# Altium PCB KamiGen2.PcbDoc
Units mil, origin at the board's own origin, x right, y up, seen from the top; angles counter-clockwise.
Board outline 3150 x 2285 mil, 2 copper layers (Top Layer, Bottom Layer); 37 components, 33 nets, 201 pads, 40 vias.
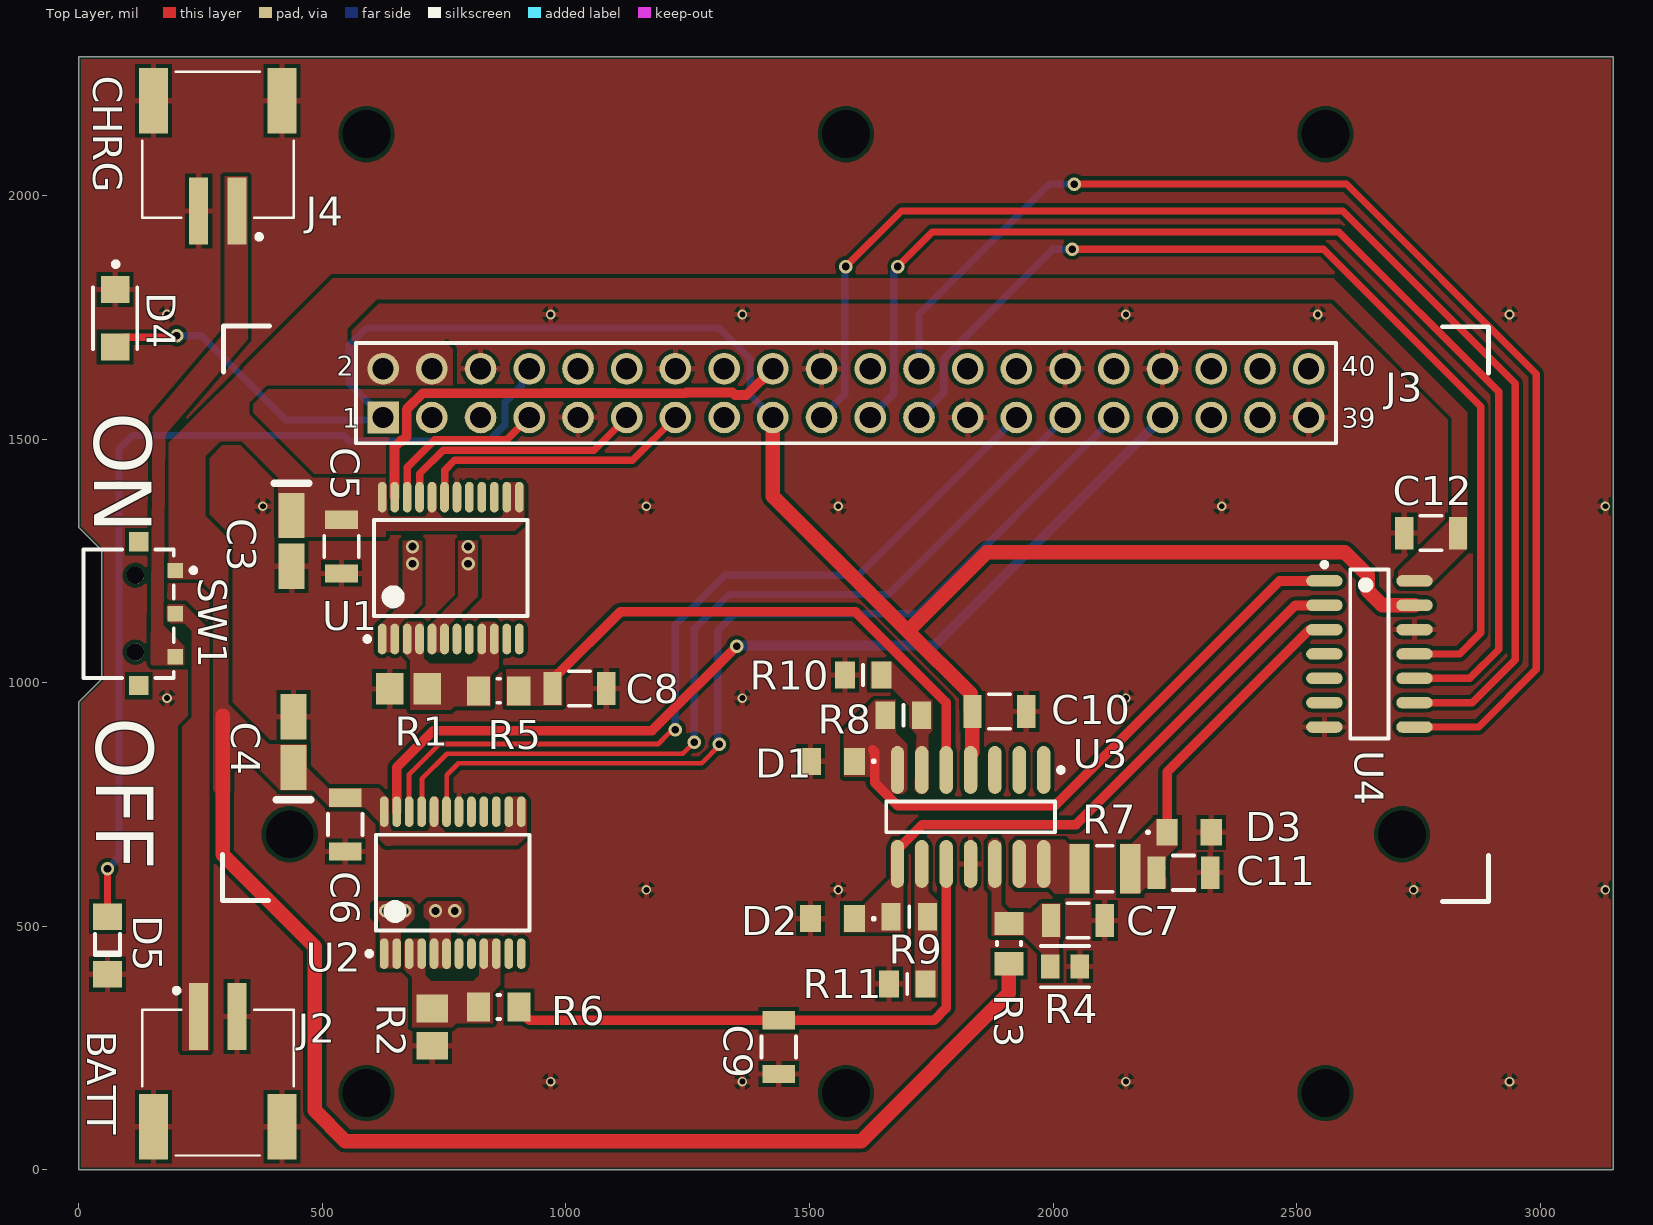
[diagram p0: Top Layer view]
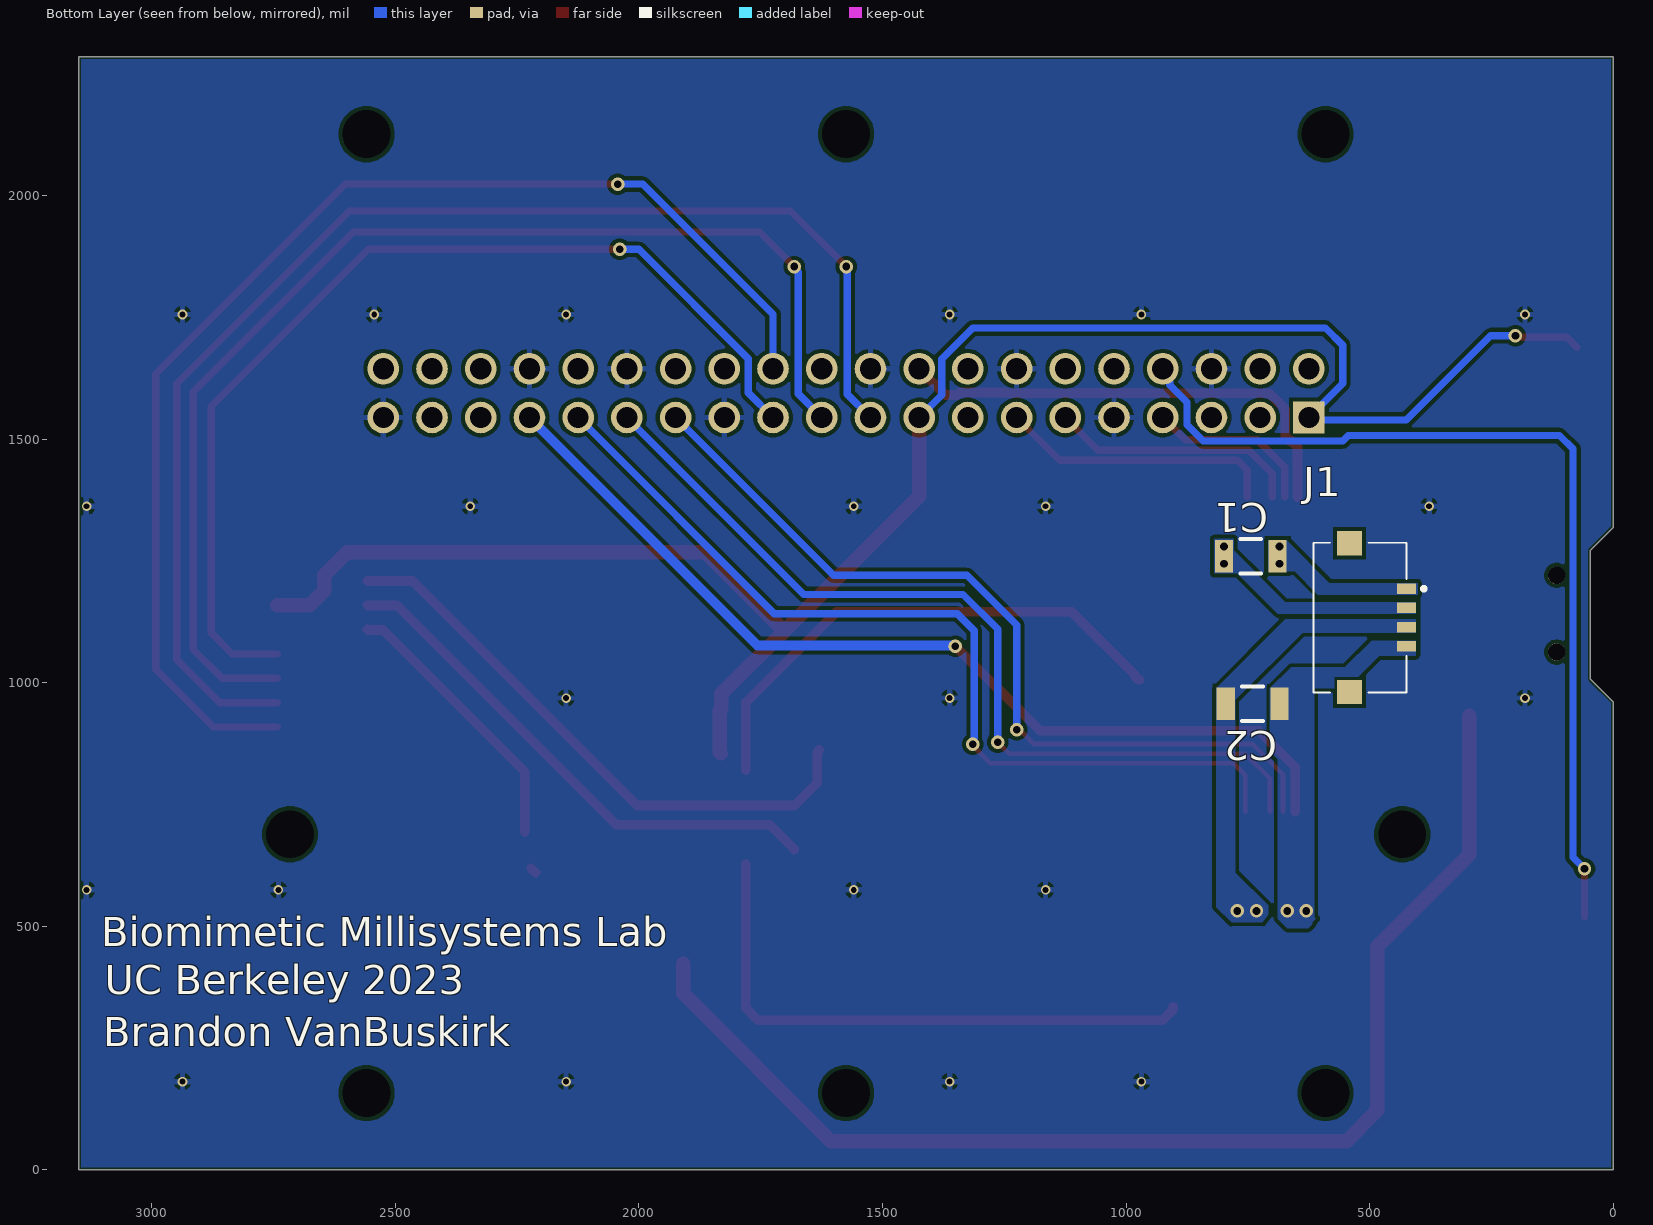
[diagram p1: Bottom Layer view, seen from below]
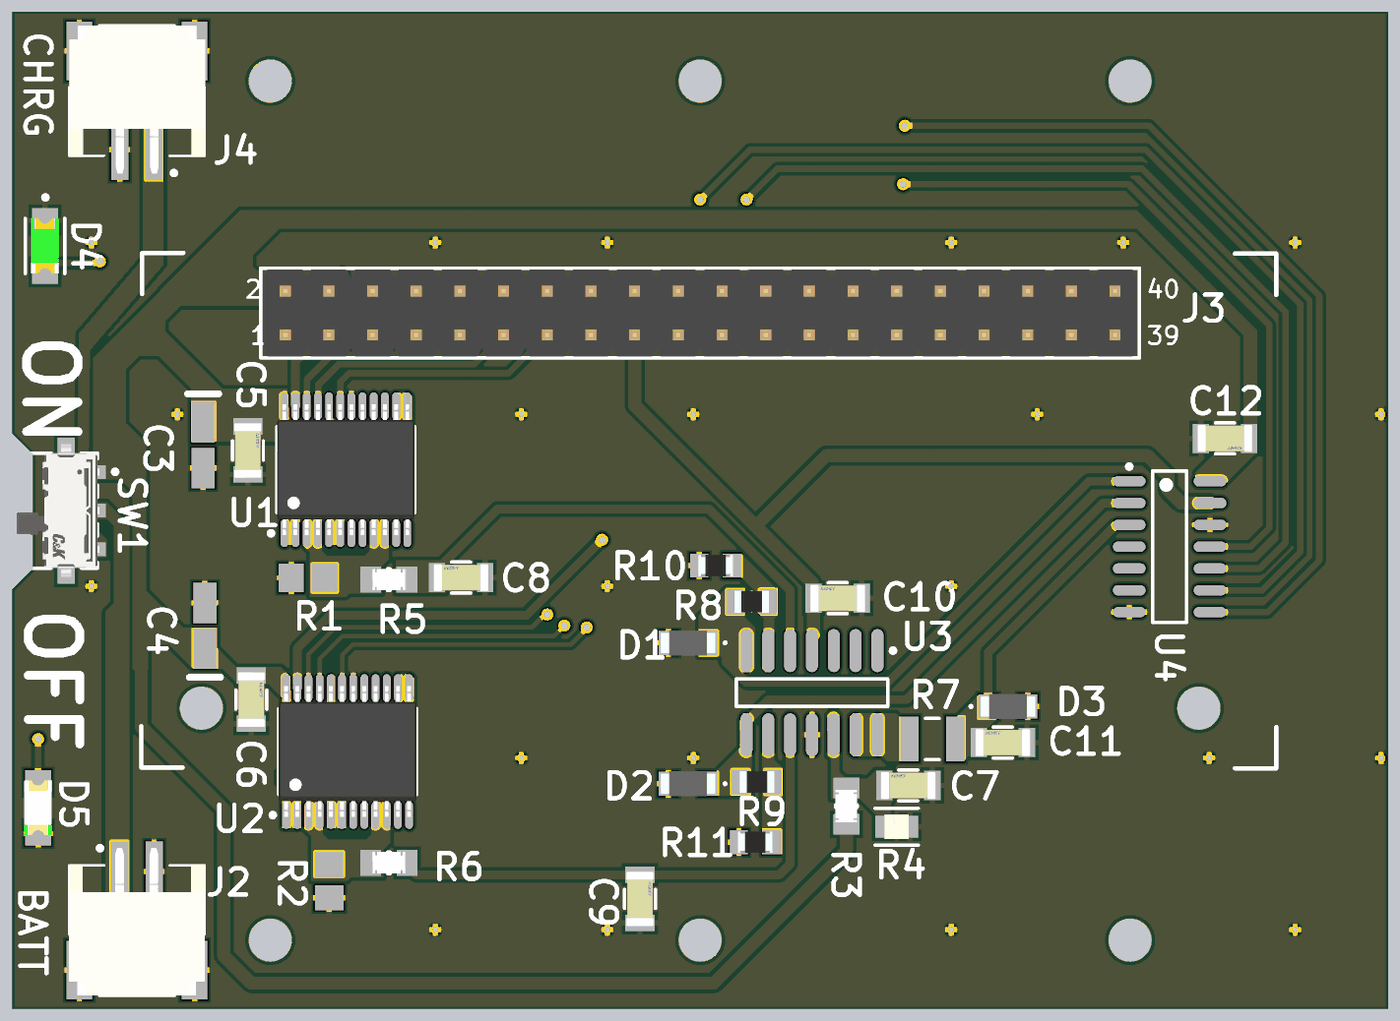
[diagram p2: 3D render of the assembled board from above, using the file's embedded part models]
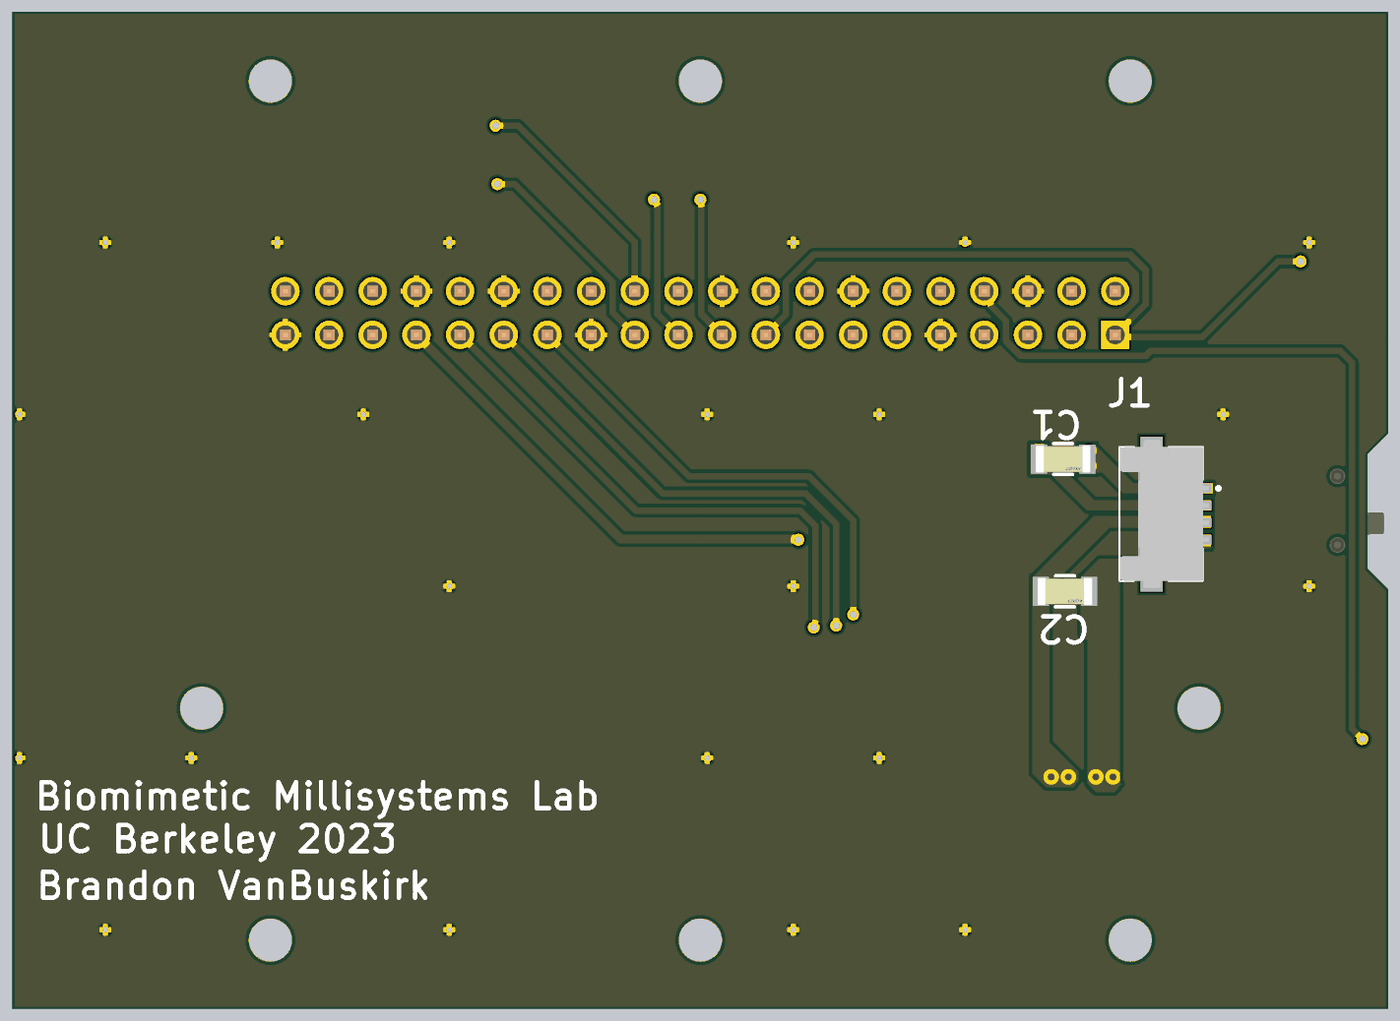
[diagram p3: 3D render of the assembled board from below, using the file's embedded part models]

## Layer stack, top to bottom
Top Solder: solder mask 0.4, Solder Resist, Dk 3.5
Top Layer: signal copper 1.4
Dielectric 1: dielectric 12.6, FR-4, Dk 4.8
Bottom Layer: signal copper 1.4
Bottom Solder: solder mask 0.4, Solder Resist, Dk 3.5

## Board outline
0,1318.9 47.24,1271.65 47.24,1007.87 0,960.63 0,0 3150,0 3150,2285 0,2285

## Design rules (kind name [scope] priority, off if disabled: settings)
BoardOutlineClearance [All] p1: gap=4.92 ignorepadtopadclearanceinfootprint=FALSE except(0: Arc-SplitContinuation Track-SplitContinuation SMDPad-SplitContinuation THPad-SplitContinuation Via-SplitContinuation Fill-SplitContinuation Poly-SplitContinuation Region-SplitContinuation Text-SplitContinuation)
Clearance Clearance_1 [InNet('GND')] p1: gap=7.87 ignorepadtopadclearanceinfootprint=FALSE
Clearance [All] p2: gap=6 ignorepadtopadclearanceinfootprint=TRUE except(0: Arc-Text Track-Text SMDPad-Text THPad-Text Via-Text Fill-Text Poly-Text Region-Text Text-Text)
Clearance Clearance_2 [All] p3: gap=10 ignorepadtopadclearanceinfootprint=TRUE except(0: Arc-Hole Track-Hole SMDPad-Hole THPad-Hole Via-Hole Fill-Hole Poly-Hole Region-Hole Text-Hole)
HoleSize [All] p1: absolutevalues=TRUE maxlimit=100 minlimit=7.87 maxpercent=80.000 minpercent=20.000
MinimumAnnularRing [All] p1 off: minimumring=5.91
PlaneConnect [All] p1: planeconnectstyle=Direct reliefexpansion=20 reliefentries=4 reliefconductorwidth=10 reliefairgap=10
PolygonConnect PolygonConnect_2 [InNet('GND') vs InNet('GND')] p1: connectstyle=Relief reliefconductorwidth=11.81 reliefentries=4 polygonreliefangle="90 Angle" airgapwidth=7.87
PolygonConnect PolygonConnect_1 [InNet('PGND') vs InNet('PGND')] p2: connectstyle=Relief reliefconductorwidth=11.81 reliefentries=4 polygonreliefangle="90 Angle" airgapwidth=7.87
PolygonConnect [All] p3: connectstyle=Direct reliefconductorwidth=10 reliefentries=4 polygonreliefangle="90 Angle" airgapwidth=10
RoutingVias [All] p1: holewidth=28 width=50 viastyle="Through Hole" minholewidth=28 minwidth=50 maxholewidth=28 maxwidth=50
SilkToSilkClearance [All] p1: silktosilkclearance=0
SolderMaskExpansion [All] p1: expansion=4 istentingtop=FALSE
Width [All] p1: maxlimit=100 minlimit=10 preferedwidth=15 minimp=50.000000 maximp=50.000000 favimp=50.000000
27 further rules are at their usual default settings.

## Components (designator, comment, footprint, x,y, rotation, side; value= is the part's Value field where it differs from the comment)
C1 "C1206C104K3RACTU" FP-C1206C-EB-MFG 744.09,1259.84 r0 bottom value=100nF
C2 "C1206C104K3RACTU" FP-C1206C-EB-MFG 740.16,956.69 r0 bottom value=100nF
C3 "T491A106K010AT" KEMT-A-3216-18-2_M 437.01,1291.34 r270 top
C4 "T491A106K010AT" KEMT-A-3216-18-2_M 440.94,877.95 r90 top
C5 "C1206C104K3RACTU" FP-C1206C-EB-MFG 539.37,1279.53 r270 top value=100nF
C6 "C1206C104K3RACTU" FP-C1206C-EB-MFG 547.24,708.66 r270 top value=100nF
C7 "C1206C104K3RACTU" FP-C1206C-EB-MFG 2051.18,511.81 r0 top value=100nF
C8 "C1206C104K3RACTU" FP-C1206C-EB-MFG 1027.56,988.19 r0 top value=100nF
C9 "C1206C104K3RACTU" FP-C1206C-EB-MFG 1437.01,251.97 r270 top value=100nF
C10 "C1206C104K3RACTU" FP-C1206C-EB-MFG 1889.76,940.94 r0 top value=100nF
C11 "C1206C104K3RACTU" FP-C1206C-EB-MFG 2267.72,610.24 r0 top value=100nF
C12 "C1206C104K3RACTU" FP-C1206C-EB-MFG 2776.2,1307.24 r180 top value=100nF
D1 "BZY55B3V3_RBG" BZY55B3V3RBG 1547.24,838.58 r180 top
D2 "BZY55B3V3_RBG" BZY55B3V3RBG 1547.24,515.75 r180 top
D3 "BZY55B3V3_RBG" BZY55B3V3RBG 2279.53,692.91 r0 top
D4 "150120GS75000" FP-150120GS75000-MFG 74.8,1748.03 r270 top
D5 "150120BS75000" 1206_A 59.06,460.63 r90 top
J1 "503763-0491" 5037630491 500,1133.86 r90 bottom
J2 "S2B-PH-SM4-TB(LF)(SN)" JST_S2B-PH-SM4-TB(LF)(SN) 285.43,314.96 r0 top
J3 "40 Pin Header (2.54mm)" 61304021121 1574.8,1594.49 r0 top
J4 "S2B-PH-SM4-TB(LF)(SN)" JST_S2B-PH-SM4-TB(LF)(SN) 285.43,1968.5 r180 top
R1 "WSL0805R0500FEA" RESC2013X46X38ML25T25 676.94,987.37 r0 top
R2 "WSL0805R0500FEA" RESC2013X46X38ML25T25 725.51,293.02 r90 top
R3 "CRCW080510K0FKEA" FP-CRCW0805-e3-IPC_A 1909.45,464.57 r90 top
R4 "ERJ-6ENF1502V" FP-ERJ6EN-IPC_C 2024.58,417.32 r180 top
R5 "CRCW080510K0FKEA" FP-CRCW0805-e3-IPC_A 861.98,983.44 r0 top
R6 "CRCW080510K0FKEA" FP-CRCW0805-e3-IPC_A 862.2,334.65 r180 top
R7 "ERJ-14NF1001U" RESC3225X70X50LL20T20 2106.3,618.11 r0 top value=1k
R8 "CRGH0805F787R" RESC2013X65N 1692.91,933.07 r0 top
R9 "CRGH0805F787R" RESC2013X65N 1704.72,519.68 r0 top
R10 "ERJ-6RBD2000V" RESC2012X70N 1610.24,1015.75 r0 top
R11 "ERJ-6RBD2000V" RESC2012X70N 1700.79,381.89 r0 top
SW1 "JS102000SAQN" FP-JS102000SAQN-MFG 102.36,1141.73 r270 top
U1 "TB6612FNG" TOSH-SSOP-24_M 763.55,1235.4 r90 top
U2 "TB6612FNG" TOSH-SSOP-24_M 767.72,589.57 r90 top
U3 "AD8544ARZ" ADI-R-14_M 1830.71,724.41 r270 top
U4 "MCP3004-I/SL" SOIC-SL14_L 2649.61,1059.06 r0 top

## Footprints (in the part's own frame and the unit in brackets; to place one, negate y for a bottom-side part, rotate by r counter-clockwise, add the part's x,y. Pads: shape width x height; smd on the part's side, far side on the other; paste and mask are expansions set on the pad)
1206_A [mm] "Chip LED, 2-Leads, Body 3.2x1.6mm, IPC Medium Density"
  rect 1.4x1.5 smd: 1(-1.5,0) 2(1.5,0)
  silkscreen extent -0.5,-0.67 0.6,0.65, body extent -1.6,-0.8 1.6,0.8, height 0.68
5037630491 [mm]
  rect 0.55x1 smd: 1(1.5,-1.925) 2(0.5,-1.925) 3(-0.5,-1.925) 4(-1.5,-1.925)
  rect 1.26x1.3 smd: 5(-3.875,1.055) 6(3.875,1.055)
  silkscreen extent -3.9,-2.92 3.9,2.93, body extent -4.3,-2.29 4.3,2.9, height 1.5
61304021121 [mm] "Pin Header, pitch 2.54 mm, THT, Vertical, dual row, 40p"
  rect 1.65x1.65 hole 1.1: 1(-24.13,-1.27)
  round 1.65 hole 1.1: 2(-24.13,1.27) 3(-21.59,-1.27) 4(-21.59,1.27) 5(-19.05,-1.27) 6(-19.05,1.27) 7(-16.51,-1.27) 8(-16.51,1.27) 9(-13.97,-1.27) 10(-13.97,1.27) 11(-11.43,-1.27) 12(-11.43,1.27) 13(-8.89,-1.27) 14(-8.89,1.27) 15(-6.35,-1.27) 16(-6.35,1.27) 17(-3.81,-1.27) 18(-3.81,1.27) 19(-1.27,-1.27) 20(-1.27,1.27) 21(1.27,-1.27) 22(1.27,1.27) 23(3.81,-1.27) 24(3.81,1.27) 25(6.35,-1.27) 26(6.35,1.27) 27(8.89,-1.27) 28(8.89,1.27) 29(11.43,-1.27) 30(11.43,1.27) 31(13.97,-1.27) 32(13.97,1.27) 33(16.51,-1.27) 34(16.51,1.27) 35(19.05,-1.27) 36(19.05,1.27) 37(21.59,-1.27) 38(21.59,1.27) 39(24.13,-1.27) 40(24.13,1.27)
  silkscreen extent -25.55,-2.61 25.55,2.62, body extent -25.4,-2.54 25.4,2.54, height 8.59
ADI-R-14_M [mm] "SOIC, 14-Leads, Body 8.65x3.9mm, Pitch 1.27mm, IPC Low Density"
  oval 2.5x0.7 smd: 1(-2.45,3.81) 2(-2.45,2.54) 3(-2.45,1.27) 4(-2.45,0) 5(-2.45,-1.27) 6(-2.45,-2.54) 7(-2.45,-3.81) 8(2.45,-3.81) 9(2.45,-2.54) 10(2.45,-1.27) 11(2.45,0) 12(2.45,1.27) 13(2.45,2.54) 14(2.45,3.81)
  silkscreen extent -2.57,-4.4 0.8,4.84, body extent -2,-4.4 2,4.4, height 1.75
BZY55B3V3RBG [mm]
  rect 1.1x1.4 smd: 1(-1.15,0) 2(1.15,0)
  silkscreen extent -2.2,-0.05 -2.1,0.05, body extent -1.59,-0.72 1.59,0.72, height 0.95
FP-150120GS75000-MFG [mm]
  rect 1.4x1.5 smd paste+0 mask+0: 1(-1.5,0) 2(1.5,0)
  silkscreen extent -2.95,-1.15 1.6,1.15, body extent -2.3,-0.95 2.3,0.95, height 0.25
FP-C1206C-EB-MFG [mm]
  rect 0.95x1.7 smd paste+0 mask+0: 1(-1.4,0) 2(1.4,0)
  silkscreen extent -0.55,-0.9 0.55,0.9, body extent -1.6,-0.8 1.6,0.8, height 0.88
FP-CRCW0805-e3-IPC_A [mil]
  rect 47.5x59.38 smd paste+0 mask+0: 1(-41.37,0) 2(41.37,0)
  silkscreen extent -3,-25 3,25, body extent -85,-49 85,49, height 10
FP-ERJ6EN-IPC_C [mil]
  rect 37.59x49.69 smd paste+0 mask+0: 1(-30.54,0) 2(30.54,0)
  silkscreen extent -49,-42 49,42, body extent -53,-31 53,31, height 10
FP-JS102000SAQN-MFG [mm]
  rect 0.8x0.8 smd paste+0 mask+0: 1(-2.25,2.43) 2(0,2.43) 3(2.25,2.43)
  rect 1x1 smd paste+0 mask+0: 4(-3.75,0.53) 5(3.75,0.53)
  round 0.9 hole 0.9 unplated paste-1000 mask+0: ""(-2,0.35) ""(2,0.35)
  silkscreen extent -3.35,-2.35 3.35,3.51, body extent -4.35,-2.45 4.35,2.93, height 0.25
JST_S2B-PH-SM4-TB(LF)(SN) [mm]
  rect 1x3.5 smd: 1(-1,0) 2(1,0)
  rect 1.5x3.4 smd: S1(-3.35,-5.75) S2(3.35,-5.75)
  silkscreen extent -3.95,-7.25 3.95,1.45, body extent -3.96,-7.22 3.94,1.38, height 5.5
KEMT-A-3216-18-2_M [mm] "Molded TAN Capacitor, 2-Leads, Body 3.4x1.8mm, IPC Low Density"
  rect 2.35x1.35 smd: 1(-1.325,0) 2(1.325,0)
  silkscreen extent -3,-0.9 -3,0.9, body extent -1.7,-0.9 1.7,0.9, height 1.8
RESC2012X70N [mm]
  rect 1.05x1.4 smd: 1(-0.95,0) 2(0.95,0)
  silkscreen extent 0,-0.53 0,0.53, body extent -1,-0.63 1,0.63, height 0.6
RESC2013X46X38ML25T25 [mm] "Chip Resistor, 2-Leads, Body 2.03x1.27mm, IPC Low Density"
  rect 1.45x1.65 smd: 1(-0.975,0) 2(0.975,0)
  body extent -1.14,-0.76 1.14,0.76, height 0.46
RESC2013X65N [mm]
  rect 1x1.45 smd: 1(-0.95,0) 2(0.95,0)
  silkscreen extent 0,-0.54 0,0.54, body extent -1,-0.64 1,0.64, height 0.65
RESC3225X70X50LL20T20 [mm] "Chip Resistor, 2-Leads, Body 3.20x2.50mm, IPC High Density"
  rect 1.05x2.6 smd: 1(-1.325,0) 2(1.325,0)
  silkscreen extent -0.4,-1.2 0.4,1.2, body extent -1.7,-1.35 1.7,1.35, height 0.7
SOIC-SL14_L [mm] "SOIC, 14-Leads, Body 8.7x3.9mm, Pitch 1.27mm, IPC High Density"
  oval 1.9x0.6 smd: 1(-2.35,3.81) 2(-2.35,2.54) 3(-2.35,1.27) 4(-2.35,0) 5(-2.35,-1.27) 6(-2.35,-2.54) 7(-2.35,-3.81) 8(2.35,-3.81) 9(2.35,-2.54) 10(2.35,-1.27) 11(2.35,0) 12(2.35,1.27) 13(2.35,2.54) 14(2.35,3.81)
  silkscreen extent -2.47,-4.4 1,4.78, body extent -2,-4.38 2,4.38, height 1.75
TOSH-SSOP-24_M [mm] "SOP, 24-Leads, Body 8x5.8mm, Pitch 0.65mm, IPC Low Density"
  oval 1.6x0.45 smd: 1(-3.7,3.575) 2(-3.7,2.925) 3(-3.7,2.275) 4(-3.7,1.625) 5(-3.7,0.975) 6(-3.7,0.325) 7(-3.7,-0.325) 8(-3.7,-0.975) 9(-3.7,-1.625) 10(-3.7,-2.275) 11(-3.7,-2.925) 12(-3.7,-3.575) 13(3.7,-3.575) 14(3.7,-2.925) 15(3.7,-2.275) 16(3.7,-1.625) 17(3.7,-0.975) 18(3.7,-0.325) 19(3.7,0.325) 20(3.7,0.975) 21(3.7,1.625) 22(3.7,2.275) 23(3.7,2.925) 24(3.7,3.575)
  silkscreen extent -3.82,-4 2.5,4.47, body extent -3.8,-4 3.8,4, height 1.6

## Part data
C1 C2 C5 C6 C7 C8 C9 C10 C11 C12: library part CMP-00100-1, "CAP CER 0.1UF 25V 10% X7R 1206", Case Code (Imperial)=1206, Case Code (Metric)=3216, Dielectric=X7R, Max Operating Temperature=125°C, Min Operating Temperature=-55°C, Package Quantity=4000, Tolerance=10%, Voltage Rating=25V, Case/Package=1206, Construction=Flat, Depth=1.6mm, Dissipation Factor=3.5%, Height=0.78mm, Length=3.2mm, Mounting Technology="Surface Mount", Packaging="Cut Tape", Reach SVHC Compliant=No, Series=C, Termination=SMD/SMT, Thickness=0.035inch, Voltage Rating (DC)=25V, Width=0.063inch
C3 C4: library part CMP-2000-05172-1, "Capacitor, Tantalum, 10 uF, +/- 10%, 10 V, -55 to 125 degC, 2-Pin SMD (1206), RoHS, Tape and Reel", Capacitance=10µF, ESR (Equivalent Series Resistance)=3.8Ohm, Lifetime @ Temp.=2000Hrs@85degC, Manufacturer=Kemet, Manufacturer Size Code=A, Operating Temperature=-55degC~125degC, Package / Case=1206(3216Metric), Package Description="2-Pin Surface Mount Device, Body 3.2 x 1.6 mm", Package Reference=1206, Standard Package=2,000, Tolerance=±10%, Voltage - Rated=10V, Catalog Drawings=T49x,T5xxSeries_A-side1T49x,T5xxSeries_A,B-side2T49x,T5xxSeries_A,SBottom, Category=Capacitors, Datasheet URL=http://www.farnell.com/datasheets/1824869.pdf, Datasheet Version=Apr-14, Family=TantalumCapacitors, Features=GeneralPurpose, Height - Seated (Max)="0.071\"(1.80mm)", Lead Spacing=-, Manufacturer URL=http://www.kemet.com/, Mounting Type=SurfaceMount, Online Catalog=T491Series, Other Names=399-3684-2, Packaging=Tape&Reel(TR), Product Training Modules=CapacitorBasics-TypicalUsesforCapacitorsDeratingGuidelinesforSurfaceMountTantalumCapacitors, Series=T491, Size / Dimension="0.126\"Lx0.063\"W(3.20mmx1.60mm)", Type=Molded
D1 D2 D3: "Diode", Manufacturer_Name="Taiwan Semiconductor", Manufacturer_Part_Number="BZY55B3V3 RBG", Mouser Part Number=821-BZY55B3V3RBG, Zener Voltage=3.3V, Datasheet Link="https://componentsearchengine.com/Datasheets/1/BZY55B3V3 RBG.pdf", Height=0.85mm, Mouser Price/Stock=https://www.mouser.co.uk/ProductDetail/Taiwan-Semiconductor/BZY55B3V3-RBG?qs=mAH9sUMRCtvrJdI%2FtfeTug%3D%3D
D4: library part CMP-1426-00014-2, "LED GREEN CLEAR 1206 SMD", Case Code (Imperial)=1206, Case Code (Metric)=3216, Color=Green, Forward Current=30mA, Forward Voltage=3.2V, Lens Color=Colorless, Max Operating Temperature=85°C, Min Operating Temperature=-40°C, Package Quantity=1, Test Current=20mA, Case/Package=1206, Dominant Wavelength=520nm, Height=0.69mm, Length=3.2mm, Lens Size=1.6mm, Lens Style=Clear, Lens Transparency=Clear, Luminous Intensity=450mcd, Mount="Surface Mount", Packaging="Cut Tape", RoHS Compliant=Yes, Series=WL-SMCW, Viewing Angle=140°, Wavelength=520nm, Width=1.6mm
D5: library part CMP-1426-00015-1, "SMD mono-color Chip LED, WL-SMCW, Blue", Color=Blue, Forward Voltage=3.2V, Manufacturer="Wuerth Elektronik", ComponentLink1Description="Manufacturer URL", ComponentLink1URL=http://www.we-online.com, ComponentLink2Description=Datasheet, ComponentLink2URL=http://katalog.we-online.com/led/datasheet/150120BS75000.pdf, PackageReference=1206, PartNumber=150120BS75000
J1: "Connector", Manufacturer_Name=Molex, Mouser Part Number=538-503763-0491, Datasheet Link=https://www.molex.com/webdocs/datasheets/pdf/en-us/5037630491_PCB_HEADERS.pdf, Height=1mm, Manufacturer_Part_Number=503763-0491, Mouser Price/Stock=https://www.mouser.co.uk/ProductDetail/Molex/503763-0491?qs=zwvsCB%2Fxu0cTZVAek%2FYVrQ%3D%3D
J2 J4: library part CMP-064-000001-2, "Connector Header Surface Mount, Right Angle 2 position 0.079 (2.00mm)", Package=None, Check_prices=https://www.snapeda.com/parts/S2B-PH-SM4-TB(LF)(SN)/JST+Sales+America+Inc./view-part/?ref=eda, Component Type=Standard, Design Item ID=S2B-PH-SM4-TB(LF)(SN), Digi-Key_Part_Number=455-1749-2-ND, MF="JST Sales", MP=S2B-PH-SM4-TB(LF)(SN), Pin Count=4, Purchase-URL=https://pricing.snapeda.com/search/part/S2B-PH-SM4-TB(LF)(SN)/?ref=eda, SnapEDA_Link=https://www.snapeda.com/parts/S2B-PH-SM4-TB(LF)(SN)/JST+Sales+America+Inc./view-part/?ref=snap, Source=S2B-PH-SM4-TB(LF)(SN).SchLib
J3: library part CMP-00112-1, "WR-PHD Straight Male, PCB Header, Through Hole, 2 Rows, 40 Contacts, 2.54mm Pitch", Flammability Rating="UL94 V-0", Insulation Color=Black, Max Operating Temperature=105°C, Min Operating Temperature=-40°C, Voltage Rating=250V, Connector Type=Header, Contact Finish - Mating=GOLD, Contact Material="Copper Alloy,Copper", Contact Plating=Gold, Contact Shape=Square, Contact Type="Male Pin", Fastening Type=Pull, Gender=Male, Insulation Material=Nylon, Mounting Technology="Through Hole", Number of Contacts=40, Number of Positions=40, Number of Rows=2, Reach SVHC Compliant=Unknown, RoHS Compliant=Yes, Series=WR-PHD, Termination=Solder
R1 R2: library part CMP-2001-04327-1, Case=0805, Manufacturer="Vishay Dale", Resistance=50mOhm, Part Number=WSL0805R0500FEA
R3 R5 R6: library part CMP-2001-04908-2, "RES Thick Film, 10kΩ, 1%, 0.125W, 100ppm/°C, 0805", Case Code (Imperial)=0805, Case Code (Metric)=2012, Max Operating Temperature=155°C, Min Operating Temperature=-55°C, Package Quantity=5000, Power Rating=125mW, Resistance=10k, Temperature Coefficient=100ppm/°C, Tolerance=1%, Voltage Rating=150V, Case/Package=0805, Composition="Thick Film", Contact Plating=Tin, Depth=1.25mm, Height=0.45mm, Lead Free="Lead Free", Length=2mm, Military Standard=Not, Packaging="Tape and Reel", Radiation Hardening=No, Termination=SMD/SMT, Voltage Rating (DC)=150V, Weight=0.000194oz, Width=1.25mm
R4: library part CMP-2001-04439-3, "RES SMD 15K OHM 1% 1/8W 0805", Case Code (Imperial)=0805, Case Code (Metric)=2012, Max Operating Temperature=155°C, Max Power Dissipation=125mW, Min Operating Temperature=-55°C, Package Quantity=1, Resistance=15k, Resistance Tolerance=1%, Resistor Type="Thick Film", Temperature Coefficient=100ppm/°C, Voltage Rating=150V, Case/Package=0805, Construction=Rectangular, Contact Plating=Tin, Depth=1.25mm, Features="Automotive AEC-Q200", Height=0.6mm, Lead Free="Lead Free", Length=2mm, Military Standard=Not, Mount="Surface Mount", Number of Pins=2, Number of Terminations=2, Packaging="Tape and Reel", Power Rating=125mW, Radiation Hardening=No, Reach SVHC Compliant=Yes, RoHS Compliant=Yes, Series=ERJ, Size Code=0805, Technology="THICK FILM", Termination=SMD/SMT, Tolerance=1%, Voltage Rating (DC)=150V, Width=1.2mm
R7: library part CMP-00078-1, "Res Thick Film 1210 1K Ohm 1% 1/2W ±100ppm/°C Molded SMD Embossed Carrier T/R", Case Code (Imperial)=1210, Case Code (Metric)=3225, Max Operating Temperature=155°C, Max Power Dissipation=500mW, Min Operating Temperature=-55°C, Package Quantity=5000, Ratings=AEC-Q200, Resistance Tolerance=1%, Resistor Type="Thick Film", Temperature Coefficient=100ppm/°C, Voltage Rating=200V, Case/Package=1210, Construction=Rectangular, Contact Plating=Tin, Depth=2.5mm, Features="Automotive AEC-Q200", Height=0.6mm, Lead Free="Lead Free", Length=3.2mm, Military Standard=Not, Mounting Technology="Surface Mount", Number of Terminations=2, Packaging="Tape and Reel", Power Rating=500mW, Radiation Hardening=No, RoHS Compliant=Yes, Series=ERJ, Technology="THICK FILM", Termination=SMD/SMT, Tolerance=1%, Voltage Rating (DC)=200V, Weight=0.000564oz, Width=2.5mm
R8 R9: "Resistor", Case=0805, Manufacturer_Name="TE Connectivity", Mouser Part Number=279-CRGH0805F787R, Resistance=787, Datasheet Link=http://docs-europe.electrocomponents.com/webdocs/12d7/0900766b812d7379.pdf, Height=0.65mm, Manufacturer_Part_Number=CRGH0805F787R, Mouser Price/Stock=https://www.mouser.co.uk/ProductDetail/TE-Connectivity-AMP/CRGH0805F787R?qs=HLeXuo0aL2qb48ulaDUW5w%3D%3D
R10 R11: "Resistor", Case=0805, Manufacturer_Name=Panasonic, Mouser Part Number=667-ERJ-6RBD2000V, Resistance=200, Arrow Part Number=ERJ-6RBD2000V, Arrow Price/Stock=https://www.arrow.com/en/products/erj6rbd2000v/panasonic, Datasheet Link=https://datasheet.datasheetarchive.com/originals/distributors/DKDS41/DSANUWW0038499.pdf, Height=0.7mm, Manufacturer_Part_Number=ERJ-6RBD2000V, Mouser Price/Stock=https://www.mouser.com/Search/Refine.aspx?Keyword=667-ERJ-6RBD2000V
SW1: library part CMP-00098-1, "Slide Switch, Js Series, SPDT, Right Angle, SMD, 1 ma Rohs Compliant: Yes", Actuator Color=Black, Contact Current Rating=1mA, Contact Resistance=70mR, Flammability Rating="UL94 V-2", Max Operating Temperature=85°C, Max Voltage Rating (DC)=5V, Min Operating Temperature=-40°C, Package Quantity=1, Actuator Length=1.5mm, Actuator Material=Nylon,Polyamide,PA46, Actuator Type=Standard, Contact Material="Copper Alloy", Contact Plating=Silver, Current Rating=1mA, Depth=4.82mm, Electrical Life=15000Cycles, Housing Material=Nylon, Length=7.8mm, Max Current Rating=1mA, Mounting Technology="Surface Mount", Orientation="Right Angle", Packaging="Tape and Reel", Reach SVHC Compliant=No, Series=JS, Switch Function=On-On, Switch Travel=1.5mm, Termination="Gull Wing", Throw Configuration=SPDT, Voltage Rating (DC)=5V
U1 U2: library part CMP-1773-00001-1, "Driver IC for Dual DC Motor, 15 V, -20 to 85 degC, 24-Pin SSOP, RoHS, Tape and Reel", Case\Package=TO-236-3, Forward Current="70 mA", Forward Voltage="1 V", Max Operating Temperature="125 degC", Max Power Dissipation="200 mW", Max Surge Current="100 mA", Min Operating Temperature="-55 degC", Package Quantity=3000, Peak Reverse Current="0.1 uA", ComponentLink1Description="Manufacturer URL", ComponentLink1URL=http://www.toshiba.com/, ComponentLink2Description=Datasheet, ComponentLink2URL=https://toshiba.semicon-storage.com/info/docget.jsp?did=10660&prodName=TB6612FNG, DatasheetVersion=Oct-14, Element Configuration="Common Cathode", Elements=2, Height="1.1 mm", Length="3 mm", Mount="Surface Mount", PackageDescription="24-Pin Shrink Small Outline Package Integrated Circuit, Body 7.8 x 5.6 mm, Pitch 0.65 mm", PackageReference=SSOP-24, Packaging="Tape and Reel", Pins=3, Radiation Hardening=No, REACH SVHC="No SVHC", Recovery Time="5 ns", RoHSCompliant=true, Width="1.4 mm"
U3: library part CMP-00114-1, "Operational Amplifier, Quad, 1 Mhz, 4, 0.92 V/ S, 2.7V To 5.5V, Soic, 14 Rohs Compliant: Yes", Case/Package=R, Input Bias Current=4pA, Input Offset Voltage (Vos)=6mV, Input Voltage Noise Density="42nV/sqrt Hz", Max Operating Temperature=125°C, Max Supply Voltage=5.5V, Min Operating Temperature=-40°C, Min Supply Voltage=2.7V, Operating Supply Current=260uA, Operating Supply Voltage=5V, Output Current per Channel=30mA, Package Quantity=56, Power Supply Rejection Ratio (PSRR)=76dB, Quiescent Current=65uA, Voltage Gain=92.04dB, Amplifier Type="GENERAL PURPOSE", Bandwidth=1MHz, Common Mode Rejection Ratio=40dB, Contact Plating=Tin,Matte, Gain Bandwidth Product=1MHz, Height=1.5mm, Lead Free="Contains Lead", Length=8.75mm, Number of Amplifiers=4, Number of Channels=4, Number of Circuits=4, Number of Elements=4, Packaging=Rail/Tube, Pins=14, Radiation Hardening=No, Reach SVHC Compliant=No, RoHS Compliant=Yes, Series=-, Settling Time=6us, Slew Rate=0.92V/µs, Technology=CMOS, Unity Gain Bandwidth Product=1MHz, Width=4mm
U4: library part CMP-014-000002-1, "4-Channel Single ADC SAR 200ksps 10-bit Serial Automotive 14-Pin SOIC N Tube"

## Free pads (board coordinates)
  round 59.06 hole 98.43: 1(433.07,688.98) 1(590.55,157.48) 1(590.55,2125.98) 1(1574.8,157.48) 1(1574.8,2125.98) 1(2559.06,157.48) 1(2559.06,2125.98) 1(2716.54,688.98)

## Via types
v1: diameter 19.68, hole 12, Top Layer to Bottom Layer, 22 vias
v2: diameter 27.56, hole 15.75, Top Layer to Bottom Layer, 18 vias

## Nets (pads, with @x,y where several pads share a name; then routed paths per layer and width w, separated by ;. In a path a pad name is that pad's centre, name@x,y a point inside that pad or via, vN(x,y) a via of type N, cw(c..) or ccw(c..) an arc to the next point about the centre after c; other vN are vias at no path point)
3V3: C10.1 D4.2 J3.1 J3.17 U3.4 U4.13 | length 3843.7
  Top Layer w15: D4.2 94.86,1709.04 193.83,1709.04 197.39,1712.6 v2(200.79,1712.6)
  Top Layer w30: J3.17 1424.8,1383.04 1701.91,1105.93 ; U3.4@1831.93,855.08 1833.94,857.09 1833.94,940.24 C10.1 1830.94,944.65 1830.94,976.9 1701.91,1105.93 ; U4.13 2675.59,1159.06 2645.67,1188.98 2645.67,1220.47 2598.43,1267.72 1863.7,1267.72 1701.91,1105.93
  Bottom Layer w15: v2(200.79,1712.6) 251.97,1712.6 425.2,1539.37 J3.1@624.8,1539.37 ; J3.1 555.12,1614.17 555.12,1692.91 590.55,1728.35 1314.96,1728.35 1378.6,1664.71 1378.6,1590.69 J3.17
A1: R1.2 R5.1 U1.3 U1.4 U1.9 U1.10
A2: R2.2 R6.2 U2.3 U2.4 U2.9 U2.10
CH0: D1.1 R8.1 U3.7 U4.1 | length 1202.3
  Top Layer w20: 1629.92,862.2 1633.86,858.27 1633.86,795.28 1681.1,748.03 2003.94,748.03 2464.96,1209.06 U4.1
CH1: D2.1 R9.1 U3.8 U4.2 | length 1083.7
  Top Layer w20: U3.8@1681.1,657.48 1732.28,708.66 2047.24,708.66 2497.13,1158.55 2556.58,1158.55 U4.2
CH2: C11.1 D3.1 R7.2 U4.3 | length 580.2
  Top Layer w20: C11.1 C11.1@2221.3,618.94 ; D3.1 2234.25,816.93 2525.68,1108.36 2556.39,1108.36 U4.3
CS: J3.24 U4.8 | length 2556.7
  Top Layer w15: v2(2043.31,2023.62) 2602.36,2023.62 2992.13,1633.86 2992.13,1027.56 2873.62,909.06 U4.8
  Bottom Layer w15: J3.24 1724.8,1756.3 1992.13,2023.62 v2(2043.31,2023.62)
GND: C3.2 C4.2 C5.2 C6.2 C7.2 C8.2 C9.2 C10.2 C11.2 C12.2 D1.2 D2.2 D3.2 D4.1 D5.1 J2.2 J2.S1 J2.S2 J3.6 J3.9 J3.14 J3.20 J3.25 J3.30 J3.34 J3.39 J4.2 J4.S1 J4.S2 R1.1 R2.1 R4.1 R10.1 R11.1 U1.18 U2.18 U3.11 U4.7 U4.12
  other v1: 968.5,181.1 1362.2,181.1 2149.61,181.1 2937.01,181.1 1165.35,574.8 1559.06,574.8 2740.16,574.8 3133.86,574.8 181.1,968.5 1362.2,968.5 2149.61,968.5 377.95,1362.2 1165.35,1362.2 1559.06,1362.2 2346.46,1362.2 3133.86,1362.2 181.1,1755.91 968.5,1755.91 1362.2,1755.91 2149.61,1755.91 2543.31,1755.91 2937.01,1755.91
M1_IN1: J3.11 U1.21 | length 521
  Top Layer w15: U1.21 700.1,1381.59 700.1,1429.6 748,1477.51 1057.82,1477.51 J3.11
M1_IN2: J3.7 U1.22 | length 354
  Top Layer w15: U1.22 674.51,1381.59 674.51,1442.22 730.81,1498.52 805.74,1498.52 843.85,1498.51 878.84,1498.52 J3.7
M1A: C1.1 J1.1 U1.1 U1.2
  other v2: 685.04,1244.09 685.04,1279.53
M1B: C1.2 J1.2 U1.5 U1.6
  other v2: 799.21,1244.09 799.21,1279.53
M2_IN1: J3.29 U2.21 | length 1831.5
  Top Layer w10: U2.21 704.26,735.76 704.26,802.68 755.91,854.33 1240.16,854.33 v2(1263.78,877.95)
  Bottom Layer w15: v2(1263.78,877.95) 1263.78,1110.24 1334.65,1181.1 1661.42,1181.1 J3.29
M2_IN2: J3.27 U2.22 | length 1752.7
  Top Layer w10: U2.22 678.15,812.01 740.16,874.02 1189,874.02 1211.3,896.32 1212.8,896.32 1220.03,903.54 v2(1224.78,903.54)
  Bottom Layer w15: v2(1224.78,903.54) 1224.78,1118.48 1326.77,1220.47 1600.79,1220.47 J3.27
M2A: C2.1 J1.4 U2.1 U2.2
  other v2: 629.92,531.5 669.29,531.5
M2B: C2.2 J1.3 U2.5 U2.6
  other v2: 732.28,531.5 771.65,531.5
MISO: J3.21 U4.10 | length 2458
  Top Layer w15: v2(1681.1,1854.33) 1751.97,1925.2 2586.61,1925.2 2914.69,1597.13 2914.69,1068.23 2855.51,1009.06 U4.10
  Bottom Layer w15: J3.21 1673.23,1592.91 1673.23,1843.06 1681.1,1850.93 v2(1681.1,1854.33)
MOSI: J3.19 U4.9 | length 2708.8
  Top Layer w15: v2(1574.8,1854.33) 1688.98,1968.5 2594.49,1968.5 2948.82,1614.17 2948.82,1047.24 2860.63,959.06 U4.9
  Bottom Layer w15: J3.19 1572.66,1592.34 1572.66,1852.19 v2(1574.8,1854.33)
NetC7_1: C7.1 R3.2 R4.2 U3.12
NetC8_1: C8.1 R5.2 U3.5 | length 1084.3
  Top Layer w20: C8.1@972,1006.08 975.57,1006.08 981.14,1011.65 981.14,1015.23 1111.58,1145.67 1594.49,1145.67 1780.71,959.45 U3.5
NetC9_1: C9.1 R6.1 U3.10 | length 1198.4
  Top Layer w20: R6.1 903.58,328.71 925.2,307.09 C9.1 1755.91,307.09 1780.71,331.89 U3.10
NetD5_2: D5.2 J3.8 | length 1928
  Top Layer w15: D5.2 v2(59.06,618.11)
  Bottom Layer w15: v2(59.06,618.11) 82.68,641.73 82.68,1480.04 110.22,1507.58 543.97,1507.58 555.49,1496.06 841.4,1496.06 870.78,1525.44 874.8,1529.48 874.8,1575.59 910.38,1611.16 910.38,1616.54 924.8,1630.97 J3.8
NetJ2_1: J2.1 SW1.2
NetJ4_1: J4.1 SW1.3
NetR7_1: R7.1 U3.13 U3.14
NetR8_2: R8.2 R10.2 U3.6
NetR9_2: R9.2 R11.2 U3.9
PWM1: J3.18 U1.23 | length 983.8
  Top Layer w20: U1.23 648.4,1484.05 660.36,1496.01 663.92,1496.01 673.28,1505.38 673.28,1561.53 705.89,1594.13 954.21,1594.13 954.92,1594.84 1099.94,1594.84 1100.64,1594.13 1245.66,1594.13 1247.54,1596.01 1341.82,1596.01 1347.28,1590.55 1370.87,1590.55 J3.18
PWM2: J3.33 U2.23 | length 1960.5
  Top Layer w20: U2.23 652.56,825.79 728.35,901.57 1177.17,901.57 v2(1350.39,1074.8)
  Bottom Layer w20: v2(1350.39,1074.8) 1351.84,1076.25 1756.57,1076.25 J3.33
SCLK: J3.23 U4.11 | length 2089.3
  Top Layer w15: v2(2039.37,1889.76) 2555.12,1889.76 2877.95,1566.93 2877.95,1102.36 2834.65,1059.06 U4.11
  Bottom Layer w15: J3.23 1775.59,1595.27 1775.59,1665.35 2000,1889.76 v2(2039.37,1889.76)
STBY1: J3.13 U1.19 | length 573.8
  Top Layer w15: U1.19 751.28,1381.59 751.28,1436.32 771.47,1456.51 1136.82,1456.51 J3.13
STBY2: J3.31 U2.19 | length 1891.8
  Top Layer w10: U2.19 755.44,735.76 755.44,810.56 779.53,834.65 1278.51,834.65 1314.96,871.1 v2(1314.96,874.02)
  Bottom Layer w15: v2(1314.96,874.02) 1312.56,876.42 1312.56,885.3 1311.56,886.29 1311.56,1106.84 1346.46,1141.73 1722.05,1141.73 J3.31
VDD: C3.1 C4.1 C5.1 C6.1 C12.1 J3.2 J3.4 R3.1 SW1.1 U1.13 U1.14 U1.20 U1.24 U2.13 U2.14 U2.20 U2.24 U4.14 | length 2526.2
  Top Layer w30: 295.28,932.13 295.28,646.81 484.25,457.84 484.25,122.05 547.24,59.06 1606.3,59.06 1909.45,362.2 1909.45,414.44 R3.1
pads on no net: J1.5 J1.6 J3.3 J3.5 J3.10 J3.12 J3.15 J3.16 J3.22 J3.26 J3.28 J3.32 J3.35 J3.36 J3.37 J3.38 J3.40 SW1. SW1.4 SW1.5 U1.7 U1.8 U1.11 U1.12 U1.15 U1.16 U1.17 U2.7 U2.8 U2.11 U2.12 U2.15 U2.16 U2.17 U3.1 U3.2 U3.3 U4.4 U4.5 U4.6

## Polygon pours and split planes (outlines as drawn)
GND on Top Layer "GND_L01_P224" (solid, pour order 224): 0,2285 0,2284.99 0,0 3150,0 3150.01,0 3150.01,2285.01
VDD on Top Layer "VDD_L01_P003" (solid, pour order 3): 275.59,917.32 275.59,779.53 279.53,775.59 311.02,775.59 311.02,818.9 326.77,834.65 362.2,834.65 362.2,874.02 314.96,921.26
CH0 on Top Layer "CH0_L01_P217" (solid, pour order 217): 1570.87,807.09 1633.86,807.09 1669.29,771.65 1692.91,771.65 1700.79,779.53 1700.79,874.02 1677.17,897.64 1677.17,964.57 1633.86,964.57 1570.87,901.57 1570.87,862.2
NetR9_2 on Top Layer "NETR9_2_L01_P222" (solid, pour order 222): 1716.54,665.35 1716.54,590.55 1716.54,354.33 1763.78,354.33 1763.78,551.18 1744.09,570.87 1744.09,665.35 1736.22,673.23 1728.35,673.23 1724.41,677.17
CH1 on Top Layer "CH1_L01_P221" (solid, pour order 221): 1665.35,661.42 1665.35,598.43 1610.24,543.31 1570.87,543.31 1570.87,488.19 1692.91,488.19 1692.91,582.68 1692.91,669.29 1685.04,677.17 1673.23,677.17
NetR8_2 on Top Layer "NETR8_2_L01_P220" (solid, pour order 220): 1716.54,791.34 1716.54,779.53 1724.41,771.65 1736.22,771.65 1744.09,779.53 1744.09,893.7 1751.97,901.57 1751.97,964.57 1748.03,964.57 1669.29,1043.31 1625.98,1043.31 1625.98,988.19 1669.29,988.19 1704.72,952.76 1704.72,909.45 1720.47,893.7
A1 on Top Layer "A1_L01_P153" (solid, pour order 153): 846.23,951.94 771.43,951.94 763.55,944.07 680.88,944.07 680.88,1046.43 665.13,1062.18 665.13,1117.29 673,1125.17 704.5,1125.17 708.43,1121.23 708.43,1050.36 720.25,1038.55 806.86,1038.55 818.67,1050.36 818.67,1117.29 826.54,1125.17 854.1,1125.17 861.98,1117.29 861.98,1030.68 846.23,1014.93
M1B on Top Layer "M1B_L01_P216" (solid, pour order 216): 716.54,1062.99 716.54,1114.17 779.53,1177.17 779.53,1291.34 818.9,1291.34 818.9,1177.17 759.84,1118.11 759.84,1062.99
VDD on Top Layer "VDD_L01_P149" (solid, pour order 149): 615.53,1322.13 615.53,1408.1 619.46,1412.03 627.34,1412.03 633.86,1405.51 633.86,1346.46 639.15,1341.17 710.02,1341.17 717.89,1349.04 717.89,1408.1 721.83,1412.03 729.7,1412.03 733.64,1408.1 733.64,1352.98 748.03,1338.58 864.91,1338.58 871.43,1345.1 871.43,1408.1 875.37,1412.03 906.87,1412.03 914.74,1404.16 914.74,1329.36 894.93,1311.84 623.98,1311.84
M1A on Top Layer "M1A_L01_P211" (solid, pour order 211): 614.17,1062.99 614.17,1114.17 665.35,1165.35 665.35,1291.34 704.72,1291.34 704.72,1161.42 657.48,1114.17 657.48,1062.99
M2B on Top Layer "M2B_L01_P210" (solid, pour order 210): 720.47,413.39 720.47,507.87 708.66,519.68 708.66,543.31 716.54,551.18 783.46,551.18 791.34,543.31 791.34,515.75 763.78,488.19 763.78,413.39
M2A on Top Layer "M2A_L01_P207" (solid, pour order 207): 618.11,413.39 618.11,507.87 606.3,519.68 606.3,543.31 614.17,551.18 681.1,551.18 688.98,543.31 688.98,515.75 661.42,488.19 661.42,413.39
A2 on Top Layer "A2_L01_P168" (solid, pour order 168): 849.53,300.89 774.73,300.89 766.85,293.02 684.17,293.02 684.17,395.38 668.43,411.13 668.43,466.24 676.3,474.12 707.8,474.12 711.73,470.18 711.73,399.32 723.54,387.5 810.16,387.5 821.97,399.32 821.97,466.24 829.84,474.12 857.4,474.12 865.28,466.24 865.28,379.63 849.53,363.88
CH2 on Top Layer "CH2_L01_P206" (solid, pour order 206): 2137.8,669.29 2137.8,566.93 2177.17,566.93 2188.98,578.74 2232.28,578.74 2232.28,641.73 2255.91,665.35 2255.91,720.47 2212.6,720.47 2161.42,669.29
VDD on Top Layer "VDD_L01_P196" (solid, pour order 196): 336.61,1641.73 336.61,1645.67 521.65,1830.71 2574.8,1830.71 2850.39,1555.12 2850.39,1275.59 2771.65,1196.85 2708.66,1196.85 2708.66,1228.34 2818.9,1338.58 2818.9,1543.31 2574.8,1787.4 612.2,1787.4 470.47,1645.67
NetC8_1 on Top Layer "NETC8_1_L01_P171" (solid, pour order 171): 877.95,1027.56 877.95,952.76 992.13,952.76 992.13,1027.56 968.5,1027.56
VDD on Top Layer "VDD_L01_P197" (solid, pour order 197): 562.99,1744.09 551.18,1732.28 551.18,1700.79 566.93,1685.04 547.24,1665.35 500,1665.35 500,1708.66 492.13,1716.54
VDD on Top Layer "VDD_L01_P170" (solid, pour order 170): 350.39,1543.31 350.39,1582.68 377.95,1610.24 366.14,1622.05 350.39,1622.05 303.15,1574.8 334.65,1543.31
NetC7_1 on Top Layer "NETC7_1_L01_P194" (solid, pour order 194): 2011.81,393.7 2011.81,472.44 2015.75,476.38 2015.75,547.24 1976.38,547.24 1956.69,527.56 1909.45,527.56 1893.7,543.31 1893.7,673.23 1885.83,681.1 1874.02,681.1 1866.14,673.23 1866.14,578.74 1874.02,570.87 1874.02,480.32 1940.94,480.32 1976.38,444.88 1976.38,393.7
NetR7_1 on Top Layer "NETR7_1_L01_P192" (solid, pour order 192): 1917.32,586.61 1925.2,578.74 1992.13,578.74 2003.94,566.93 2074.8,566.93 2074.8,669.29 2031.5,669.29 2023.62,677.17 1925.2,677.17 1917.32,669.29
VDD on Top Layer "VDD_L01_P189" (solid, pour order 189): 635.76,763.1 615.4,783.46 511.81,783.46 468.5,826.77 468.5,874.02 389.76,874.02 307.09,956.69 307.09,1295.28 240.16,1362.2 228.35,1350.39 228.35,1232.28 279.53,1181.1 275.59,1177.17 275.59,917.32 413.39,779.53 480.31,779.53 515.75,744.09 586.61,744.09 618.11,712.6 618.11,677.21 629.97,665.35 641.73,665.35 641.73,698.08 639.02,700.79 639.02,759.84
VDD on Top Layer "VDD_L01_P151" (solid, pour order 151): 185.04,1212.6 259.84,1212.6 259.84,1484.25 385.83,1610.24 767.72,1610.24 767.72,1685.04 755.91,1696.85 751.97,1692.91 385.83,1692.91 185.04,1492.13
VDD on Top Layer "VDD_L01_P188" (solid, pour order 188): 256.89,1439.96 256.89,1461.61 302.17,1506.89 290.35,1518.7 274.61,1518.7 217.52,1461.61 239.17,1439.96
VDD on Top Layer "VDD_L01_P146" (solid, pour order 146): 620.69,676.46 620.69,762.43 624.63,766.36 632.5,766.36 639.02,759.84 639.02,700.79 644.32,695.5 715.18,695.5 720.72,701.04 720.72,760.09 726.99,766.36 734.87,766.36 738.8,762.43 738.8,707.31 753.2,692.91 870.08,692.91 876.6,699.43 876.6,762.43 880.54,766.36 912.03,766.36 919.91,758.49 919.91,683.69 900.09,666.17 629.15,666.17
VDD on Top Layer "VDD_L01_P157" (solid, pour order 157): 409.45,1421.26 334.65,1496.06 279.53,1496.06 279.53,1519.69 330.71,1570.87 480.32,1421.26 598.43,1421.26 629.92,1421.26 629.92,1299.21 409.45,1299.21
NetJ4_1 on Top Layer "NETJ4_1_L01_P145" (solid, pour order 145): 216.54,1074.8 173.23,1118.11 178.06,1509.34 346.46,1704.79 346.46,2039.37 299.21,2039.37 299.21,1719.36 151.97,1547.24 147.64,1035.43 216.54,1035.43 122.05,1035.43 216.54,1035.43
NetJ2_1 on Top Layer "NETJ2_1_L01_P037" (solid, pour order 37): 181.1,1157.48 181.1,1129.92 188.98,1122.05 216.54,1122.05 232.28,1106.3 232.28,929.13 212.6,909.45 212.6,244.09 267.72,244.09 267.72,1110.24 216.54,1161.42 185.04,1161.42
GND on Bottom Layer "GND_L02_P223" (solid, pour order 223): 0.16,2285.12 0.16,0.17 0.01,0.02 3150.02,0.02 3150.02,2284.98 3150,2284.99
M2A on Bottom Layer "M2A_L02_P215" (solid, pour order 215): 405.51,1086.61 405.51,1055.12 480.32,1055.12 547.24,988.19 614.17,988.19 614.17,519.68 610.24,515.75 618.11,507.87 618.11,503.94 625.98,496.06 669.29,496.06 688.98,515.75 688.98,842.52 704.72,858.27 704.72,988.19 661.42,1031.5 551.18,1031.5 496.06,1086.61
M2B on Bottom Layer "M2B_L02_P214" (solid, pour order 214): 551.18,1129.92 405.51,1129.92 405.51,1102.36 515.75,1102.36 637.8,1102.36 775.59,964.57 775.59,610.24 708.66,543.31 708.66,523.62 720.47,507.87 783.46,507.87 814.96,539.37 814.96,988.19 673.23,1129.92
M1B on Bottom Layer "M1B_L02_P213" (solid, pour order 213): 818.9,1295.28 818.9,1224.41 771.65,1224.41 688.98,1141.73 405.51,1141.73 405.51,1165.35 673.23,1165.35 779.53,1271.65 779.53,1295.28
M1A on Bottom Layer "M1A_L02_P212" (solid, pour order 212): 669.29,1291.34 582.68,1204.72 401.57,1204.72 401.57,1181.1 606.3,1181.1 653.54,1228.35 708.66,1228.35 708.66,1291.34

## Silkscreen, mask and mechanical layers (free items; w line width, h text height)
Top Overlay:
  lines w10: 295.29,647.3 295.29,552.81 389.78,552.81 ; 296.91,1637.78 296.91,1732.27 391.4,1732.27 ; 2799.21,551.18 2893.7,551.18 2893.7,645.67 ; 2799.2,1730.65 2893.69,1730.65 2893.69,1636.16
  text "CHRG" at 29.68,2245.91 h60 r270
  text "ON" at 31.5,1555.12 h118.11 r270
  text "OFF" at 35.43,929.13 h118.11 r270
  text "BATT" at 17.87,285.28 h60 r270
Bottom Overlay:
  text "Biomimetic Millisystems Lab" at 3104.17,459.13 h60
  text "UC Berkeley 2023" at 3096.3,360.7 h60
  text "Brandon VanBuskirk" at 3100.24,254.09 h60

## Text inside footprints (layer, text, board x,y; h text height)
J3: Top Overlay "2" at 529.13,1629.92 h40; Top Overlay "1" at 540.94,1523.62 h40; Top Overlay "39" at 2592.91,1523.62 h40; Top Overlay "40" at 2592.91,1629.92 h40